# Altium PCB IR_Detector.PcbDoc
Units mil, origin at the board's own origin, x right, y up, seen from the top; angles counter-clockwise.
Board outline 1735 x 1240 mil, 2 copper layers (Top Layer, Bottom Layer); 25 components, 0 nets, 121 pads, 4 vias.
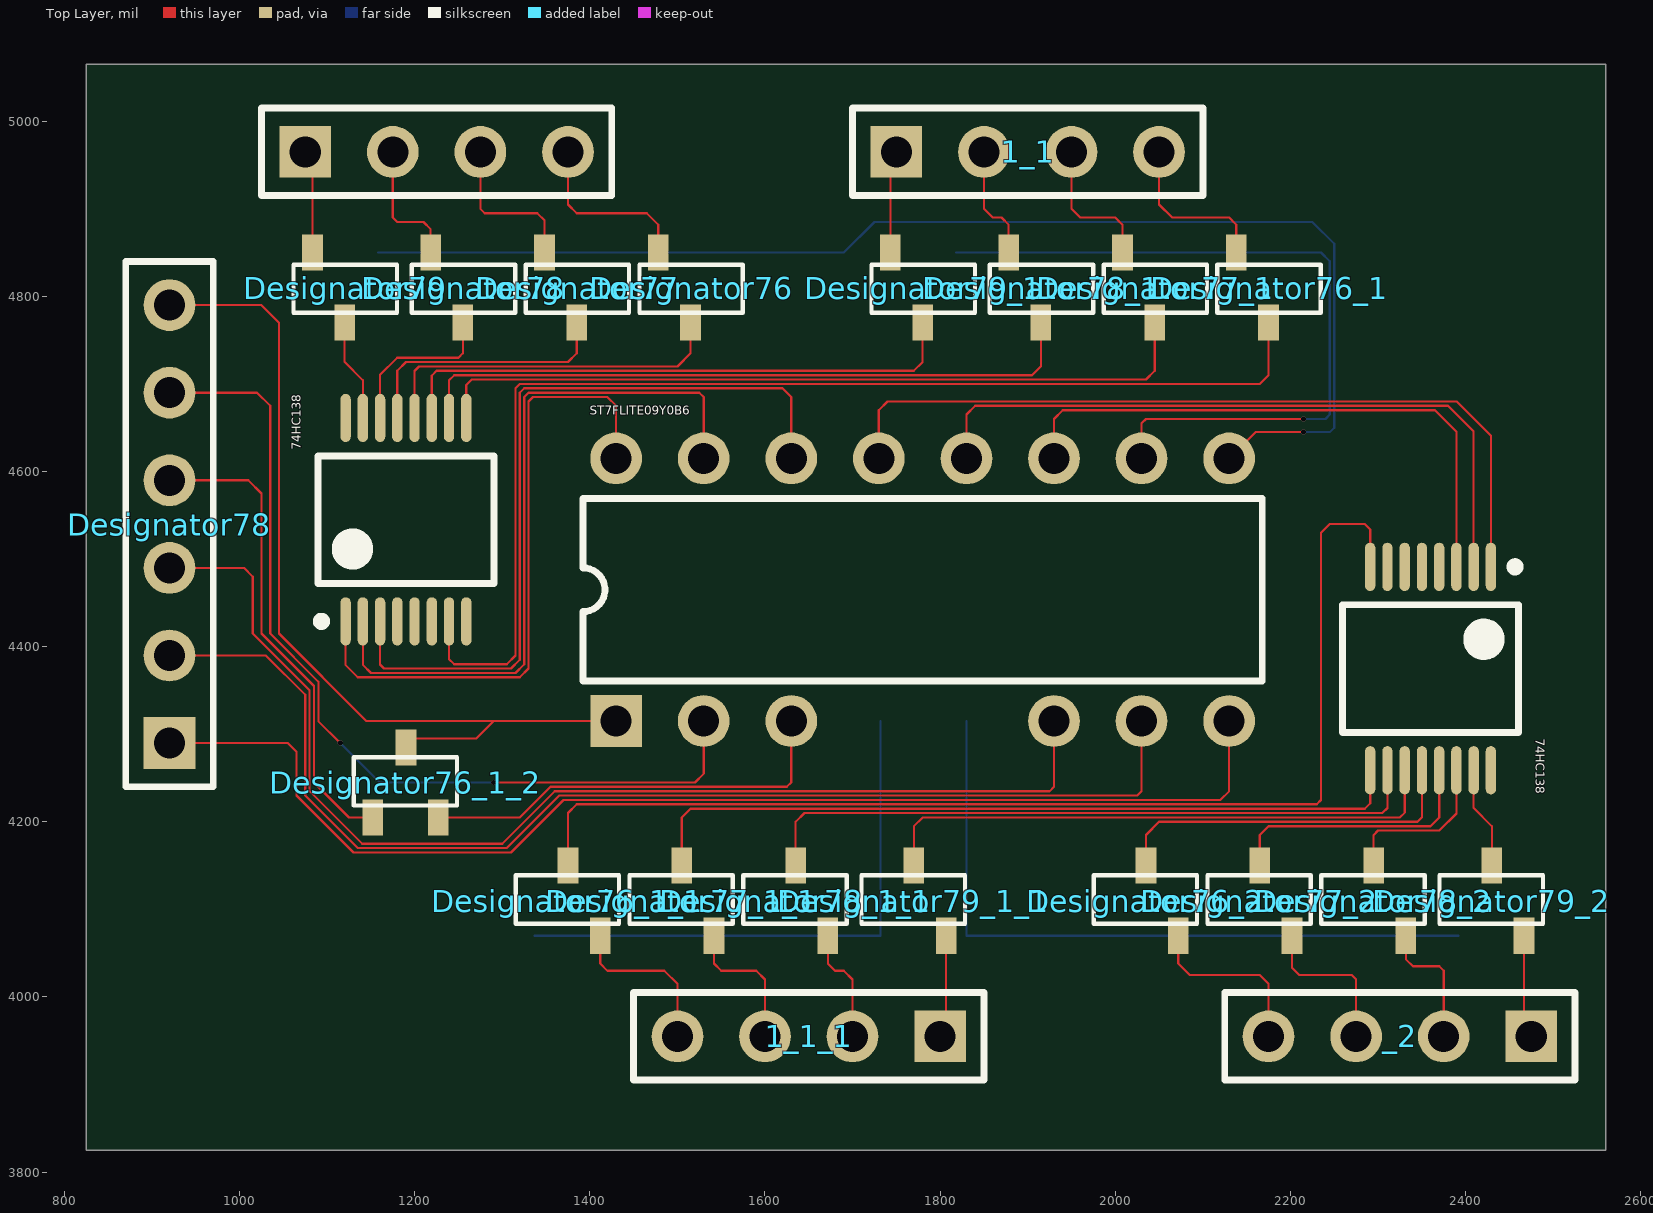
[diagram p0: Top Layer view]
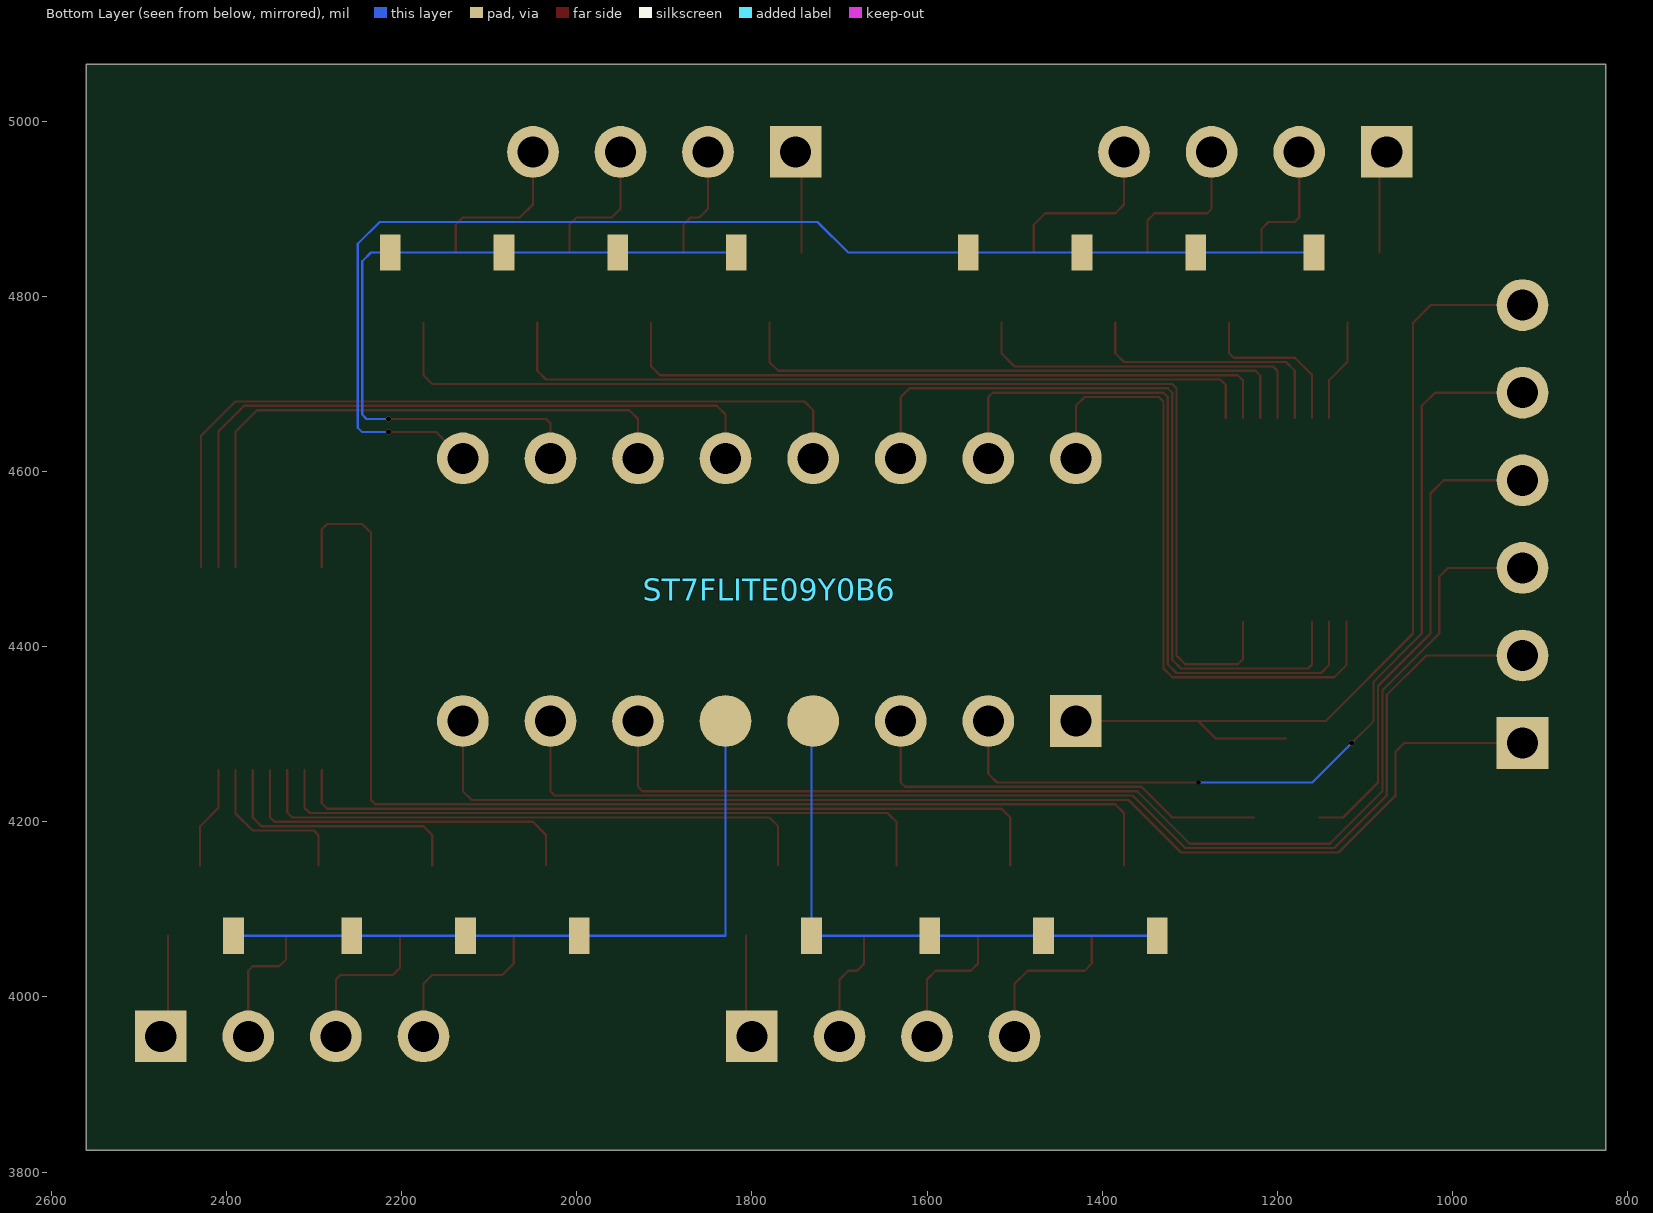
[diagram p1: Bottom Layer view, seen from below]

## Layer stack, top to bottom
Top Solder: solder mask 0.4, Solder Resist, Dk 3.5
Top Layer: signal copper 1.4
Dielectric 1: dielectric 12.6, FR-4, Dk 4.8
Bottom Layer: signal copper 1.4
Bottom Solder: solder mask 0.4, Solder Resist, Dk 3.5

## Board outline
825,3825 2560,3825 2560,5065 825,5065

## Design rules (kind name [scope] priority, off if disabled: settings)
Clearance [All] p1: gap=10 ignorepadtopadclearanceinfootprint=FALSE except(0: Arc-Hole Track-Hole SMDPad-Hole THPad-Hole Via-Hole Fill-Hole Poly-Hole Region-Hole Text-Hole)
PolygonConnect [All] p1: connectstyle=Relief reliefconductorwidth=10 reliefentries=4 polygonreliefangle="90 Angle" airgapwidth=10
RoutingVias [All] p1: holewidth=28 width=50 viastyle="Through Hole" minholewidth=28 minwidth=50 maxholewidth=28 maxwidth=50
SolderMaskExpansion [All] p1: expansion=4
Width [All] p1: maxlimit=10 minlimit=10 preferedwidth=10
30 further rules are at their usual default settings.

## Components (designator, comment, footprint, x,y, rotation, side; value= is the part's Value field where it differs from the comment)
1_1 "Comment" HDR1X4 1750,4965 r0 top
1_1_1 "Comment" HDR1X4 1800,3955 r180 top
74HC138 "Comment" 74HC138 1190,4545 r90 top
74HC138 "Comment" 74HC138 2360,4375 r270 top
_2 "Comment" HDR1X4 2475,3955 r180 top
Designator76 "Comment" SOT-23#1 1553,4850 r180 top
Designator76_1 "Comment" SOT-23#1 2213,4850 r180 top
Designator76_1_1 "Comment" SOT-23#1 1337,4070 r0 top
Designator76_1_2 "Comment" SOT-23#2 1152,4205 r0 top
Designator76_2 "Comment" SOT-23#1 1997,4070 r0 top
Designator77 "Comment" SOT-23#1 1423,4850 r180 top
Designator77_1 "Comment" SOT-23#1 2083,4850 r180 top
Designator77_1_1 "Comment" SOT-23#1 1467,4070 r0 top
Designator77_2 "Comment" SOT-23#1 2127,4070 r0 top
Designator78 "Comment" SOT-23#1 1293,4850 r180 top
Designator78 "Comment" HDR1X6 920,4290 r90 top
Designator78_1 "Comment" SOT-23#1 1953,4850 r180 top
Designator78_1_1 "Comment" SOT-23#1 1597,4070 r0 top
Designator78_2 "Comment" SOT-23#1 2257,4070 r0 top
Designator79 "Comment" SOT-23#1 1158,4850 r180 top
Designator79_1 "Comment" SOT-23#1 1818,4850 r180 top
Designator79_1_1 "Comment" SOT-23#1 1732,4070 r0 top
Designator79_2 "Comment" SOT-23#1 2392,4070 r0 top
ST7FLITE09Y0B6 "Comment" PDIP16 1780,4465 r0 top
? "Comment" HDR1X4 1075,4965 r0 top

## Footprints (in the part's own frame and the unit in brackets; to place one, negate y for a bottom-side part, rotate by r counter-clockwise, add the part's x,y. Pads: shape width x height; smd on the part's side, far side on the other; paste and mask are expansions set on the pad)
74HC138 [mm] "SOP127P600-8N"
  oval 1.4x0.3 smd: 1(-2.95,1.75) 2(-2.95,1.25) 3(-2.95,0.75) 4(-2.95,0.25) 5(-2.95,-0.25) 6(-2.95,-0.75) 7(-2.95,-1.25) 8(-2.95,-1.75) 9(2.95,-1.75) 10(2.95,-1.25) 11(2.95,-0.75) 12(2.95,-0.25) 13(2.95,0.25) 14(2.95,0.75) 15(2.95,1.25) 16(2.95,1.75)
  silkscreen extent -3.07,-2.55 1.85,2.57, body extent -3.16,-2.55 3.16,2.55, height 1.1
HDR1X4 [mm] "Connector; Header; 4 Position"
  rect 1.5x1.5 hole 0.9: 1(0,0)
  round 1.5 hole 0.9: 2(2.54,0) 3(5.08,0) 4(7.62,0)
  silkscreen extent -1.27,-1.27 8.89,1.27
HDR1X6 [mm] "Connector; Header; 6 Position"
  rect 1.5x1.5 hole 0.9: 1(0,0)
  round 1.5 hole 0.9: 2(2.54,0) 3(5.08,0) 4(7.62,0) 5(10.16,0) 6(12.7,0)
  silkscreen extent -1.27,-1.27 13.97,1.27
PDIP16 [mm] "DIP; 16 Leads; Row Spacing 7.62 mm; Pitch 2.54 mm"
  rect 1.5x1.5 hole 0.9: 1(-8.89,-3.81)
  round 1.5 hole 0.9: 2(-6.35,-3.81) 3(-3.81,-3.81) 6(3.81,-3.81) 7(6.35,-3.81) 8(8.89,-3.81) 9(8.89,3.81) 10(6.35,3.81) 11(3.81,3.81) 12(1.27,3.81) 13(-1.27,3.81) 14(-3.81,3.81) 15(-6.35,3.81) 16(-8.89,3.81)
  round 1.5 smd far side: 4(-1.27,-3.81) 5(1.27,-3.81)
  silkscreen extent -9.85,-2.65 9.85,2.65
SOT-23#1 [mm]
  rect 0.6x1.05 smd far side: 1(0,0)
  rect 0.6x1.05 smd: 2(1.9,0) 3(0.965,2.032)
  silkscreen extent -0.55,0.35 2.45,1.75
SOT-23#2 [mm]
  rect 0.6x1.05 smd: 1(0,0) 2(1.9,0) 3(0.965,2.032)
  silkscreen extent -0.55,0.35 2.45,1.75

## Via types
v1: diameter 5.75, hole 5.75, Top Layer to Bottom Layer, 4 vias

## Nets (pads, with @x,y where several pads share a name; then routed paths per layer and width w, separated by ;. In a path a pad name is that pad's centre, name@x,y a point inside that pad or via, vN(x,y) a via of type N, cw(c..) or ccw(c..) an arc to the next point about the centre after c; other vN are vias at no path point)
pads on no net: 1_1.1 1_1.2 1_1.3 1_1.4 1_1_1.1 1_1_1.2 1_1_1.3 1_1_1.4 74HC138.1 74HC138.2 74HC138.3 74HC138.4 74HC138.5 74HC138.6 74HC138.7 74HC138.8 74HC138.9 74HC138.10 74HC138.11 74HC138.12 74HC138.13 74HC138.14 74HC138.15 74HC138.16 ?.1 ?.2 ?.3 ?.4 _2.1 _2.2 _2.3 _2.4 Designator76.1 Designator76.2 Designator76.3 Designator76_1.1 Designator76_1.2 Designator76_1.3 Designator76_1_1.1 Designator76_1_1.2 Designator76_1_1.3 Designator76_1_2.1 Designator76_1_2.2 Designator76_1_2.3 Designator76_2.1 Designator76_2.2 Designator76_2.3 Designator77.1 Designator77.2 Designator77.3 Designator77_1.1 Designator77_1.2 Designator77_1.3 Designator77_1_1.1 Designator77_1_1.2 Designator77_1_1.3 Designator77_2.1 Designator77_2.2 Designator77_2.3 Designator78.1 Designator78.2 Designator78.3 Designator78.4 Designator78.5 Designator78.6 Designator78_1.1 Designator78_1.2 Designator78_1.3 Designator78_1_1.1 Designator78_1_1.2 Designator78_1_1.3 Designator78_2.1 Designator78_2.2 Designator78_2.3 Designator79.1 Designator79.2 Designator79.3 Designator79_1.1 Designator79_1.2 Designator79_1.3 Designator79_1_1.1 Designator79_1_1.2 Designator79_1_1.3 Designator79_2.1 Designator79_2.2 Designator79_2.3 ST7FLITE09Y0B6.1 ST7FLITE09Y0B6.2 ST7FLITE09Y0B6.3 ST7FLITE09Y0B6.4 ST7FLITE09Y0B6.5 ST7FLITE09Y0B6.6 ST7FLITE09Y0B6.7 ST7FLITE09Y0B6.8 ST7FLITE09Y0B6.9 ST7FLITE09Y0B6.10 ST7FLITE09Y0B6.11 ST7FLITE09Y0B6.12 ST7FLITE09Y0B6.13 ST7FLITE09Y0B6.14 ST7FLITE09Y0B6.15 ST7FLITE09Y0B6.16
copper on no net: | length 27733.6
  Top Layer w2.51: 910,4490 1005,4490 1015,4480 1015,4415 1080,4350 1080,4235 1140,4175 1300,4175 1360,4235 1925,4235 1930,4240 1930,4315 ; 920,4290 1055,4290 1065,4280 1065,4230 1130,4165 1310,4165 1370,4225 2120,4225 2130,4235 2130,4315 ; 920,4390 1030,4390 1075,4345 1075,4230 1135,4170 1305,4170 1365,4230 2025,4230 2030,4235 2030,4315 ; 920,4590 1010,4590 1025,4575 1025,4415 1085,4355 1085,4245 1125,4205 1152,4205 ; 920,4690 1020,4690 1035,4675 1035,4415 1090,4360 1090,4315 v1(1115,4290) ; 920,4790 1025,4790 1045,4770 1045,4415 1145,4315 1290,4315 ; 1083.2,4850 1083.2,4956.8 ; 1120,4770 1120,4725 1140.79,4704.21 1140.79,4661.14 ; 1121.1,4428.86 1121.1,4378.9 1135,4365 1320,4365 1330,4375 1330,4680 1335,4685 1420,4685 1430,4675 1430,4615 ; 1140.79,4428.86 1140.79,4379.21 1150,4370 1315,4370 1325,4380 1325,4685 1330,4690 1525,4690 1530,4685 1530,4615 ; 1160.47,4428.86 1160.47,4379.53 1165,4375 1310,4375 1320,4385 1320,4690 1325,4695 1620,4695 1630,4685 1630,4615 ; 1160.47,4661.14 1160.47,4704.53 1160.47,4710.47 1180,4730 1250,4730 1255,4735 1255,4770 ; 1175,4965 1175,4890 1180,4885 1210,4885 1218.2,4876.8 1218.2,4850 ; 1180.16,4661.14 1180.16,4715.16 1190,4725 1375,4725 1385,4735 1385,4770 ; 1190,4295 1270,4295 1290,4315 ; 1199.84,4661.14 1199.84,4714.84 1205,4720 1500,4720 1515,4735 1515,4770 ; 1219.53,4661.14 1219.53,4709.53 1225,4715 1770,4715 1780,4725 1780,4770 ; 1226.8,4205 1320,4205 1355,4240 1625,4240 1630,4245 1630,4315 ; 1239.21,4428.86 1239.21,4385.79 1245,4380 1265,4380 1305,4380 1315,4390 1315,4695 1320,4700 2165,4700 2175,4710 2175,4770 ; 1239.21,4661.14 1239.21,4704.21 1245,4710 1905,4710 1915,4720 1915,4770 ; 1258.9,4661.14 1258.9,4698.9 1265,4705 2035,4705 2045,4715 2045,4770 ; 1275,4965 1275,4900 1280,4895 1340,4895 1348.2,4886.8 1348.2,4850 ; v1(1290,4245) 1520,4245 1530,4255 1530,4315 ; 1375,4150 1375,4210 1385,4220 2230,4220 2235,4225 2235,4530 2245,4540 2285,4540 2291.1,4533.9 2291.1,4491.14 ; 1375,4965 1375,4905 1385,4895 1465,4895 1478.2,4881.8 1478.2,4850 ; 1411.8,4070 1411.8,4038.2 1420,4030 1485,4030 1500,4015 1500,3955 ; 1430,4315 1295,4315 1290,4315 ; 1505,4150 1505,4205 1515,4215 2285,4215 2291.1,4221.1 2291.1,4258.86 ; 1541.8,4070 1541.8,4038.2 1550,4030 1590,4030 1600,4020 1600,3955 ; 1635,4150 1635,4200 1645,4210 2305,4210 2310.79,4215.79 2310.79,4258.86 ; 1671.8,4070 1671.8,4038.2 1680,4030 1690,4030 1700,4020 1700,3955 ; 1730,4615 1730,4670 1740,4680 2390,4680 2428.9,4641.1 2428.9,4491.14 ; 1743.2,4850 1743.2,4963.2 ; 1770,4150 1770,4195 1780,4205 2325,4205 2330.47,4210.47 2330.47,4258.86 ; 1806.8,3956.8 1806.8,4070 ; 1830,4615 1830,4665 1840,4675 2380,4675 2409.21,4645.79 2409.21,4491.14 ; 1850,4965 1850,4900 1860,4890 1870,4890 1878.2,4881.8 1878.2,4850 ; 1930,4615 1930,4660 1940,4670 2365,4670 2389.53,4645.47 2389.53,4491.14 ; 1950,4965 1950,4900 1960,4890 2000,4890 2008.2,4881.8 2008.2,4850 ; 2030,4615 2030,4655 2035,4660 v1(2215,4660) ; 2035,4150 2035,4185 2050,4200 2345,4200 2350.16,4205.16 2350.16,4258.86 ; 2050,4965 2050,4905 2065,4890 2130,4890 2138.2,4881.8 2138.2,4850 ; 2071.8,4070 2071.8,4038.2 2085,4025 2165,4025 2175,4015 2175,3955 ; 2130,4615 2160,4645 v1(2215,4645) ; 2165,4150 2165,4185 2175,4195 2360,4195 2369.84,4204.84 2369.84,4258.86 ; 2201.8,4070 2201.8,4033.2 2210,4025 2270,4025 2275,4020 2275,3955 ; 2295,4150 2295,4185 2300,4190 2370,4190 2389.53,4209.53 2389.53,4215.47 2389.53,4258.86 ; 2331.8,4070 2331.8,4043.2 2340,4035 2370,4035 2375,4030 2375,3955 ; 2409.21,4258.86 2409.21,4215.79 2430,4195 2430,4150 ; 2466.8,3963.2 2466.8,4070
  Bottom Layer w2.51: v1(1115,4290) 1160,4245 v1(1290,4245) ; 1158,4850 1293,4850 1553,4850 1690,4850 1725,4885 2225,4885 2250,4860 2250,4650 2245,4645 v1(2215,4645) ; 1337,4070 1467,4070 1732,4070 1732,4315 ; 1818,4850 1953,4850 2213,4850 2235,4850 2245,4840 2245,4665 2240,4660 v1(2215,4660) ; 1830,4315 1830,4070 1997,4070 2127,4070 2392,4070